# Altium PCB PCB1.PcbDoc
Units mm, origin at the board's own origin, x right, y up, seen from the top; angles counter-clockwise.
Board outline 152.4 x 101.6 mm, 2 copper layers (Top Layer, Bottom Layer); 37 components, 17 nets, 111 pads, 0 vias.
Unrouted connection lines stored in the file: 82.
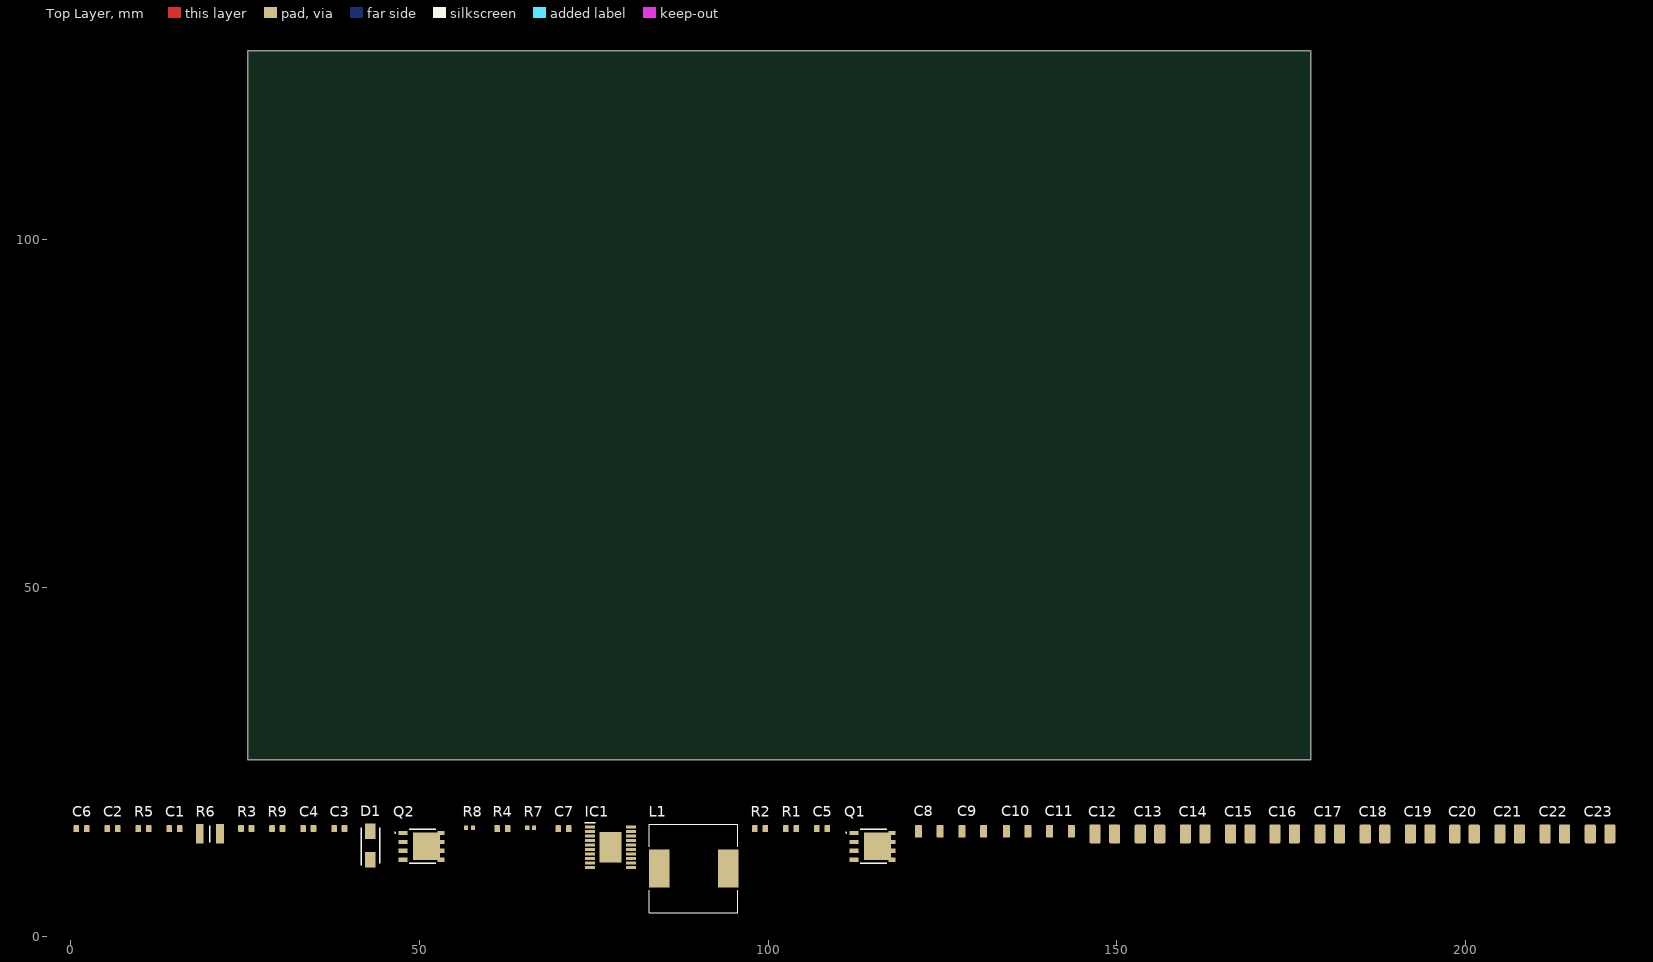
[diagram p0: Top Layer view]
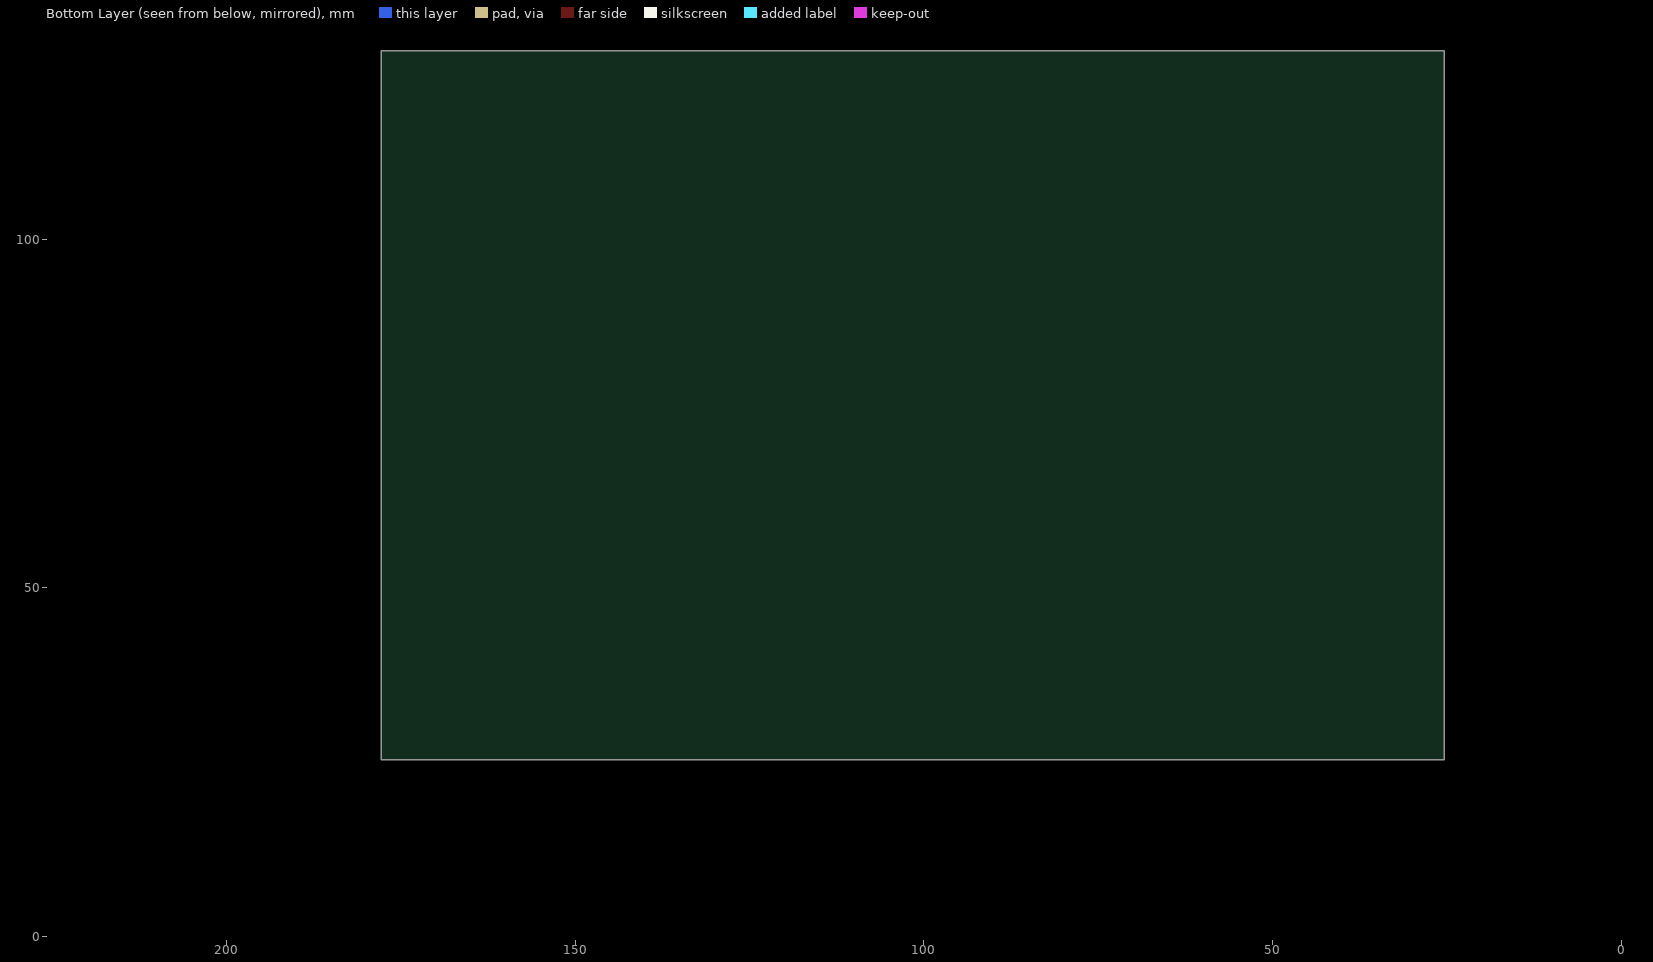
[diagram p1: Bottom Layer view, seen from below]

## Layer stack, top to bottom
Top Solder: solder mask 0.0102, Solder Resist, Dk 3.5
Top Layer: signal copper 0.0356
Dielectric 1: dielectric 0.32, FR-4, Dk 4.8
Bottom Layer: signal copper 0.0356
Bottom Solder: solder mask 0.0102, Solder Resist, Dk 3.5

## Board outline
25.4,25.4 177.8,25.4 177.8,127 25.4,127

## Design rules (kind name [scope] priority, off if disabled: settings)
Clearance [All] p1: gap=0.254 ignorepadtopadclearanceinfootprint=FALSE except(0: Arc-Hole Track-Hole SMDPad-Hole THPad-Hole Via-Hole Fill-Hole Poly-Hole Region-Hole Text-Hole)
PolygonConnect [All] p1: connectstyle=Relief reliefconductorwidth=0.254 reliefentries=4 polygonreliefangle="90 Angle" airgapwidth=0.254
RoutingVias [All] p1: holewidth=0.711 width=1.27 viastyle="Through Hole" minholewidth=0.711 minwidth=1.27 maxholewidth=0.711 maxwidth=1.27
SolderMaskExpansion [All] p1: expansion=0.102 istentingtop=FALSE
Width [All] p1: maxlimit=0.254 minlimit=0.254 preferedwidth=0.254
30 further rules are at their usual default settings.

## Components (designator, comment, footprint, x,y, rotation, side; value= is the part's Value field where it differs from the comment)
C1 "C0603" CAP_0603 14.922,15.494 r0 top value=10pF
C2 "C0603" CAP_0603 6.032,15.494 r0 top value=150pF
C3 "C0603" CAP_0603 38.544,15.494 r0 top value=750pF
C4 "C0603" CAP_0603 34.099,15.494 r0 top value=0.01uF
C5 "C0603" CAP_0603 107.759,15.494 r0 top value=0.1uF
C6 "C0603" CAP_0603 1.587,15.494 r0 top value=1uF
C7 "C0603" CAP_0603 70.675,15.494 r0 top value=1uF
C8 "C1206" CAP_1206 123.126,15.113 r0 top value=2.2uF
C9 "C1206" CAP_1206 129.35,15.113 r0 top value=2.2uF
C10 "C1206" CAP_1206 135.7,15.113 r0 top value=2.2uF
C11 "C1206" CAP_1206 141.922,15.113 r0 top value=2.2uF
C12 "C1210" CAP_1210 148.273,14.732 r0 top value=22uF
C13 "C1210" CAP_1210 154.749,14.732 r0 top value=22uF
C14 "C1210" CAP_1210 161.226,14.732 r0 top value=22uF
C15 "C1210" CAP_1210 167.703,14.732 r0 top value=22uF
C16 "C1210" CAP_1210 174.053,14.732 r0 top value=22uF
C17 "C1210" CAP_1210 180.53,14.732 r0 top value=22uF
C18 "C1210" CAP_1210 187.007,14.732 r0 top value=22uF
C19 "C1210" CAP_1210 193.484,14.732 r0 top value=22uF
C20 "C1210" CAP_1210 199.834,14.732 r0 top value=22uF
C21 "C1210" CAP_1210 206.311,14.732 r0 top value=22uF
C22 "C1210" CAP_1210 212.788,14.732 r0 top value=22uF
C23 "C1210" CAP_1210 219.266,14.732 r0 top value=22uF
D1 "" DIOM5127X229N 42.989,13.081 r90 top
IC1 "LM5116MHX_NOPB" SOP65P640X110-21N 77.406,12.827 r0 top
L1 "" IND_SPRH127-560M 89.344,9.779 r0 top value="15uH, 28.7mOhm"
Q1 "" SIR426DPT1GE3 114.998,12.954 r0 top
Q2 "" SIR426DPT1GE3 50.355,12.954 r0 top
R1 "R0603" RES_0603 103.314,15.494 r0 top value=33k
R2 "R0603" RES_0603 98.87,15.494 r0 top value=2.7k
R3 "R0603" RES_0603 25.209,15.494 r0 top value=180k
R4 "R0603" RES_0603 61.912,15.494 r0 top value=12.4k
R5 "R0603" RES_0603 10.477,15.494 r0 top value=10k
R6 "" RESC3126X65N 20.002,14.732 r0 top value="0.01Ohm 0.5w"
R7 "R0402" RES_0402 65.977,15.621 r0 top value=10.7k
R8 "R0402" RES_0402 57.213,15.621 r0 top value=1.21k
R9 "R0603" RES_0603 29.654,15.494 r0 top value=470k

## Footprints (in the part's own frame and the unit in brackets; to place one, negate y for a bottom-side part, rotate by r counter-clockwise, add the part's x,y. Pads: shape width x height; smd on the part's side, far side on the other; paste and mask are expansions set on the pad)
CAP_0603 [mm]
  rrect25% 0.8x1 smd: 1(-0.75,0) 2(0.75,0)
  body extent -0.8,-0.4 0.8,0.4, height 0.51
CAP_1206 [mm]
  rrect25% 1x1.8 smd: 1(-1.55,0) 2(1.55,0)
  body extent -1.6,-0.8 1.6,0.8, height 0.94
CAP_1210 [mm]
  rrect25% 1.6x2.7 smd: 1(-1.4,0) 2(1.4,0)
  body extent -1.6,-1.25 1.6,1.25, height 2.5
DIOM5127X229N [mm]
  rect 2.2x1.55 smd: 1(-2.05,0) 2(2.05,0)
  silkscreen extent -2.83,-1.33 2.55,1.33, body extent -2.55,-1.33 2.55,1.33, height 2.29
IND_SPRH127-560M [mm]
  rect 2.9x5.4 smd: 1(-4.95,0) 2(4.95,0)
  silkscreen extent -6.35,-6.35 6.35,6.35, body extent -6,-6 6,6, height 8.05
RES_0402 [mm]
  rrect25% 0.6x0.7 smd: 1(-0.5,0) 2(0.5,0)
  body extent -0.5,-0.25 0.5,0.25, height 0.3
RES_0603 [mm]
  rrect25% 0.8x1 smd: 1(-0.75,0) 2(0.75,0)
  body extent -0.8,-0.43 0.8,0.43, height 0.52
RESC3126X65N [mm]
  rect 1.1x2.8 smd: 1(-1.45,0) 2(1.45,0)
  silkscreen extent 0,-1.2 0,1.2, body extent -1.55,-1.3 1.55,1.3, height 0.65
SIR426DPT1GE3 [mm]
  rect 1.27x0.61 smd: 1(-2.67,1.905) 2(-2.67,0.635) 3(-2.67,-0.635) 4(-2.67,-1.905)
  rect 0.71x0.61 smd: 5(2.95,-1.905) 6(2.95,-0.635) 7(2.95,0.635) 8(2.95,1.905)
  rect 3.81x3.91 smd: 9(0.69,0)
  rect 0.31x0.255 smd: 10(2.44,-2.083) 11(2.44,2.083)
  silkscreen extent -3.85,-2.45 2,2.45, body extent -3.07,-2.58 3.07,2.58, height 1.12
SOP65P640X110-21N [mm]
  rect 1.45x0.45 smd: 1(-2.925,2.925) 2(-2.925,2.275) 3(-2.925,1.625) 4(-2.925,0.975) 5(-2.925,0.325) 6(-2.925,-0.325) 7(-2.925,-0.975) 8(-2.925,-1.625) 9(-2.925,-2.275) 10(-2.925,-2.925) 11(2.925,-2.925) 12(2.925,-2.275) 13(2.925,-1.625) 14(2.925,-0.975) 15(2.925,-0.325) 16(2.925,0.325) 17(2.925,0.975) 18(2.925,1.625) 19(2.925,2.275) 20(2.925,2.925)
  rect 3.15x4.35 smd: 21(0,0)
  silkscreen extent -3.65,3.5 -2.2,3.5, body extent -3.21,-3.25 3.21,3.25, height 1

## Part data
C1: library part CAP_0603, "Capacitor SMD 0603", Dielectric=C0G(NP0), Part Number=GRM1885C1H100JA01D, Voltage (V)=25
C2: library part CAP_0603, "Capacitor SMD 0603", Dielectric=C0G(NP0), Part Number=GRM1885C1H151JA01D, Voltage (V)=25
C3: library part CAP_0603, "Capacitor SMD 0603", Dielecrtic=COG(NP0), Part Number=GRM1885C1H751J
C4: library part CAP_0603, "Capacitor SMD 0603", Part Number=GRM188R71H103KA01D
C5: library part CAP_0603, "Capacitor SMD 0603", Part Number=GRM188R72A104KA35D, Voltage (V)=100
C6 C7: library part CAP_0603, "Capacitor SMD 0603", Part Number=GRM188R61H105KAALD, Voltage (V)=25
C8 C9 C10 C11: library part CAP_1206, "Capacitor SMD 1206", Part Number=GRM31CR72A225KA73L, Voltage (V)=100
C12 C13 C14 C15 C16 C17 C18 C19 C20 C21 C22 C23: library part CAP_1210, "Capacitor SMD 1210", Part Number=GRM32ER71E226KE15L, Voltage (V)=25
D1: library part ES1D-E3_61T, "Diode", Manufacturer_Name=Vishay, Part Number=ES1D-E3/61T
IC1: "Integrated Circuit", Arrow Part Number=LM5116MHX/NOPB, Manufacturer_Name="Texas Instruments", Mouser Part Number=926-LM5116MHX/NOPB, Arrow Price/Stock=https://www.arrow.com/en/products/lm5116mhxnopb/texas-instruments?region=nac, Height=1.1mm, Manufacturer_Part_Number=LM5116MHX/NOPB, Mouser Price/Stock=https://www.mouser.co.uk/ProductDetail/Texas-Instruments/LM5116MHX-NOPB?qs=QbsRYf82W3EaCl%2FW15P7yA%3D%3D, Part Number=LM5116MHX_NOPB
L1: library part SPRH127-560M, Package=None, Part Number=SPRH127-150M, Availability=Unavailable, MP=SPRH127-150M, Price=None
Q1 Q2: library part SIR426DP-T1-GE3, "MOSFET (N-Channel)", Part Number=SIR426DP-T1-GE3
R1: library part RES_0603, "Resistor SMD 0603", Part Number=RC0603FR-0733KL
R2: library part RES_0603, "Resistor SMD 0603", Part Number=RC0603JR-072K7L
R3: library part RES_0603, "Resistor SMD 0603", Part Number=RC0603FR-07180KL
R4: library part RES_0603, "Resistor SMD 0603", Part Number=RC0603FR-0712K4L
R5: library part RES_0603, "Resistor SMD 0603", Part Number=AC0603FR-0710KL
R6: library part RL1210FR-070R1L, "Resistor", Part Number=RL1210FR-070R01L
R7 R8: library part RES_0402, "Resistor SMD 0402", Part Number=RC0402FR-071K21L
R9: library part RES_0603, "Resistor SMD 0603", Part Number=RC0603FR-07470KL

## Nets (pads, with @x,y where several pads share a name; then routed paths per layer and width w, separated by ;. In a path a pad name is that pad's centre, name@x,y a point inside that pad or via, vN(x,y) a via of type N, cw(c..) or ccw(c..) an arc to the next point about the centre after c; other vN are vias at no path point)
FB: C1.2 IC1.8 R3.1 R7.2 R8.2
GND: C3.2 C4.2 C5.1 C6.1 C8.1 C9.1 C10.1 C11.1 C12.1 C13.1 C14.1 C15.1 C16.1 C17.1 C18.1 C19.1 C20.1 C21.1 C22.1 C23.1 IC1.6 IC1.13 IC1.14 IC1.17 IC1.21 R2.1 R4.2 R5.2 R6.1 R8.1
NetC1_1: C1.1 C2.1 IC1.9
NetC2_2: C2.2 R3.2
NetC4_1: C4.1 IC1.7
NetC6_2: C6.2 D1.2 IC1.16 R9.1
NetC7_1: C7.1 D1.1 IC1.18
NetC7_2: C7.2 IC1.20 L1.1 Q1.1 Q1.2 Q1.3 Q2.5 Q2.6 Q2.7 Q2.8 Q2.9 Q2.10 Q2.11
NetIC1_2: IC1.2 R1.1 R2.2
NetIC1_3: IC1.3 R4.1
NetIC1_11: IC1.11 R5.1
NetIC1_12: IC1.12 Q2.1 Q2.2 Q2.3 R6.2
NetIC1_15: IC1.15 Q2.4
NetIC1_19: IC1.19 Q1.4
RAMP: C3.1 IC1.5 R9.2
Vin: C5.2 C8.2 C9.2 C10.2 C11.2 IC1.1 IC1.4 Q1.5 Q1.6 Q1.7 Q1.8 Q1.9 Q1.10 Q1.11 R1.2
Vout: C12.2 C13.2 C14.2 C15.2 C16.2 C17.2 C18.2 C19.2 C20.2 C21.2 C22.2 C23.2 IC1.10 L1.2 R7.1